# Altium PCB PCB1.PcbDoc
Units mil, origin at the board's own origin, x right, y up, seen from the top; angles counter-clockwise.
Board outline 3485 x 1215 mil, 2 copper layers (Top Layer, Bottom Layer); 8 components, 4 nets, 17 pads, 0 vias.
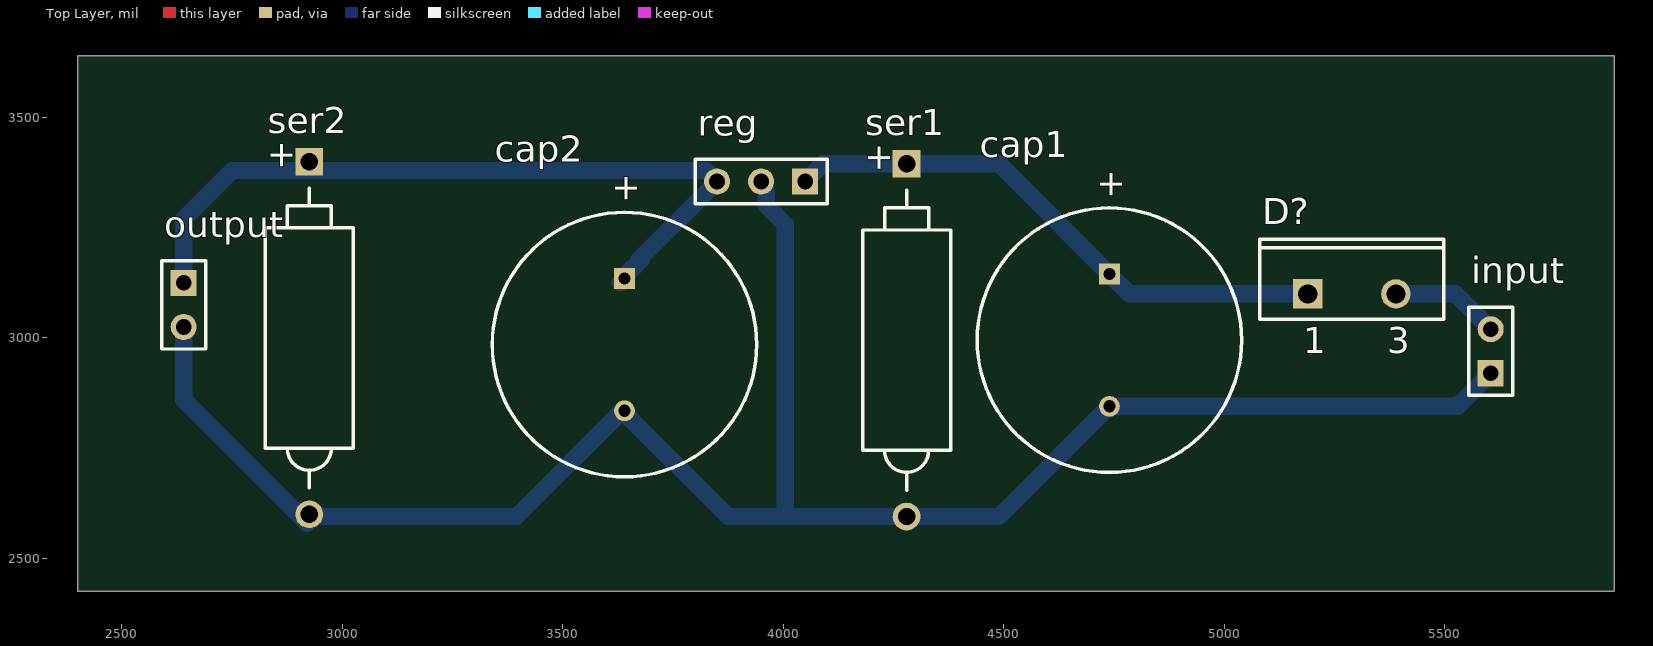
[diagram p0: Top Layer view]
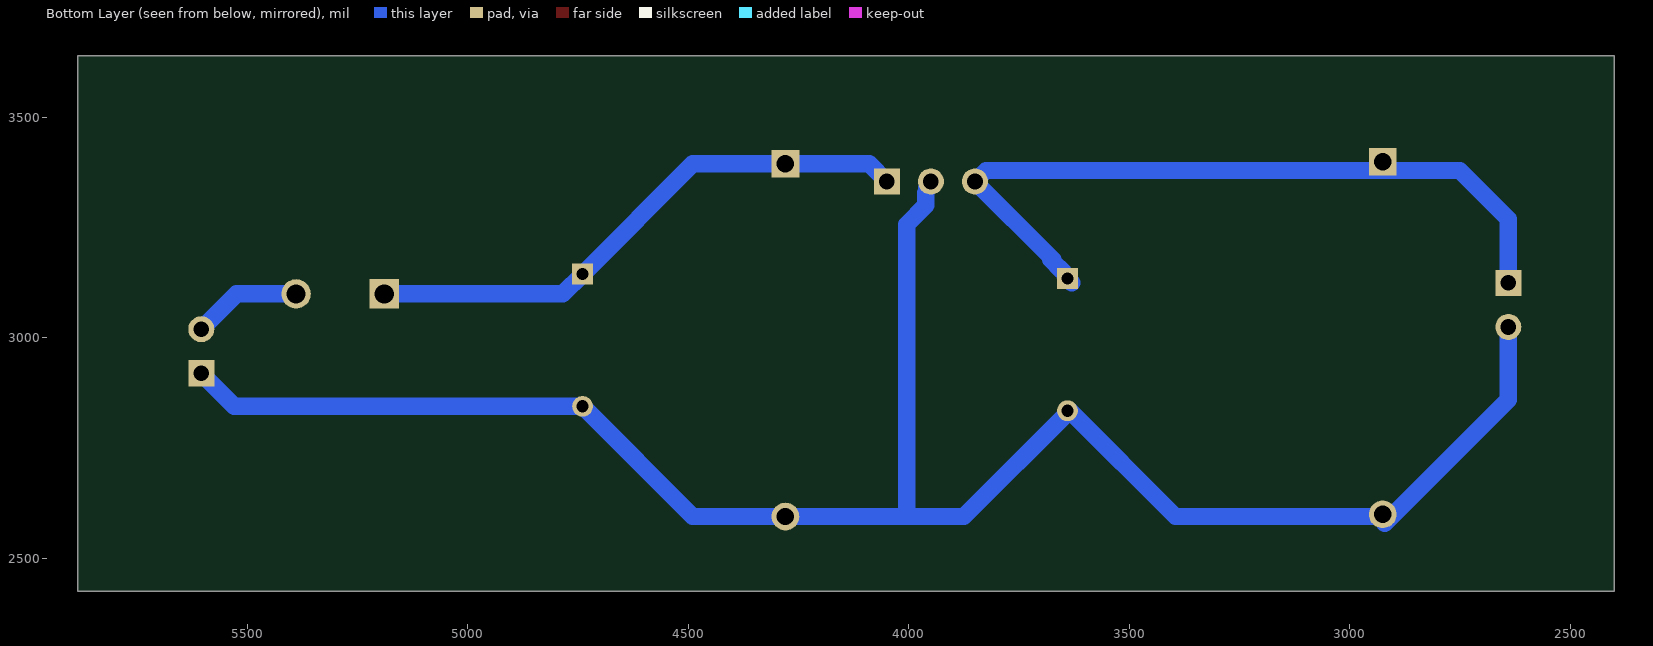
[diagram p1: Bottom Layer view, seen from below]

## Layer stack, top to bottom
Top Solder: solder mask 0.4, Solder Resist, Dk 3.5
Top Layer: signal copper 1.4
Dielectric 1: dielectric 12.6, FR-4, Dk 4.8
Bottom Layer: signal copper 1.4
Bottom Solder: solder mask 0.4, Solder Resist, Dk 3.5

## Board outline
2400,2425 5885,2425 5885,3640 2400,3640

## Design rules (kind name [scope] priority, off if disabled: settings)
Clearance [All] p1: gap=39.37 ignorepadtopadclearanceinfootprint=FALSE
PolygonConnect [All] p1: connectstyle=Direct reliefconductorwidth=10 reliefentries=4 polygonreliefangle="90 Angle" airgapwidth=10
RoutingLayers [All] p1: top layer_v5=FALSE bottom layer_v5=TRUE
RoutingVias [All] p1: holewidth=28 width=50 viastyle="Through Hole" minholewidth=28 minwidth=50 maxholewidth=28 maxwidth=50
SolderMaskExpansion [All] p1: expansion=4 istentingtop=FALSE
Width [All] p1: maxlimit=39.37 minlimit=39.37 preferedwidth=39.37 checkconnectedcopper=TRUE
29 further rules are at their usual default settings.

## Components (designator, comment, footprint, x,y, rotation, side; value= is the part's Value field where it differs from the comment)
cap1 "Cap 1" RB7.6-15 4740,2995 r90 top value=0.22microf
cap2 "Cap 2" RB7.6-15 3640,2985 r90 top value="10 microf"
D? "Diode 10TQ035" TO-220AC 5290,3100 r0 top
input "Header 2" HDR1X2 5605,2920 r90 top
output "Header 2" HDR1X2 2640,3125 r270 top
reg "Header 3" HDR1X3 4050,3355 r180 top
ser1 "Cap Pol2" POLAR0.8 4280,2995 r90 top value=0.1
ser2 "Cap Pol2" POLAR0.8 2925,3000 r90 top value=0.1

## Footprints (in the part's own frame and the unit in brackets; to place one, negate y for a bottom-side part, rotate by r counter-clockwise, add the part's x,y. Pads: shape width x height; smd on the part's side, far side on the other; paste and mask are expansions set on the pad)
HDR1X2 [mm] "Connector; Header; 2 Position"
  rect 1.5x1.5 hole 0.9: 1(0,0)
  round 1.5 hole 0.9: 2(2.54,0)
  silkscreen extent -1.27,-1.27 3.81,1.27
HDR1X3 [mm] "Connector; Header; 3 Position"
  rect 1.5x1.5 hole 0.9: 1(0,0)
  round 1.5 hole 0.9: 2(2.54,0) 3(5.08,0)
  silkscreen extent -1.27,-1.27 6.35,1.27
POLAR0.8 [mm] "Polarized Capacitor; 2 Leads"
  rect 1.6x1.6 hole 1: 1(10.16,0)
  round 1.6 hole 1: 2(-10.16,0)
  silkscreen extent -8.64,-2.54 8.64,2.54
RB7.6-15 [mm] "Polarized Capacitor (Radial); 2 Leads"
  rect 1.2x1.2 hole 0.7: 1(3.81,0)
  round 1.2 hole 0.7: 2(-3.81,0)
  silkscreen extent -7.62,-7.62 7.62,7.62
TO-220AC [mm] "TO, Thru-Hole, Vertical, Heatsink Mounted; 3 In-Line Leads (1 Absent); Pitch 2.54 mm"
  rect 1.7x1.7 hole 1.1: 1(-2.54,0)
  round 1.7 hole 1.1: 3(2.54,0)
  silkscreen extent -5.3,-1.45 5.3,3.15

## Part data
cap1 cap2: library part "Cap Pol1", "Polarized Capacitor (Radial)", LatestRevisionDate=17-Jul-2002, LatestRevisionNote="Re-released for DXP Platform.", PackageDescription="Polarized Capacitor (Radial); 2 Leads", PackageReference=RB7.6-15, Published=8-Jun-2000, Publisher="Altium Limited"
D?: "Schottky Rectifier", ComponentLink1Description="Manufacturer Link", ComponentLink1URL=http://www.irf.com/, ComponentLink2Description=Datasheet, ComponentLink2URL=http://www.irf.com/product-info/datasheets/data/10tq.pdf, DatasheetVersion=PD-2.057B, LatestRevisionDate=17-Jul-2002, LatestRevisionNote="Re-released for DXP Platform.", Note="Terminal 2 is the TAB and is electrically connected to the cathode", PackageDescription="TO, Thru-Hole, Vertical, Heatsink Mounted; 3 In-Line Leads (1 Absent); Pitch 2.54 mm", PackageReference=TO-220AC, PackageVersion=Feb-1998, Published=8-Jun-2000, Publisher="Altium Limited"
input output: "Header, 2-Pin", LatestRevisionDate=17-Jul-2002, LatestRevisionNote="Re-released for DXP Platform.", Publisher="Altium Limited"
reg: "Header, 3-Pin", LatestRevisionDate=17-Jul-2002, LatestRevisionNote="Re-released for DXP Platform.", Publisher="Altium Limited"
ser1 ser2: "Polarized Capacitor (Axial)", LatestRevisionDate=17-Jul-2002, LatestRevisionNote="Re-released for DXP Platform.", PackageDescription="Polarized Capacitor; 2 Leads", PackageReference=POLAR0.8, Published=8-Jun-2000, Publisher="Altium Limited"

## Nets (pads, with @x,y where several pads share a name; then routed paths per layer and width w, separated by ;. In a path a pad name is that pad's centre, name@x,y a point inside that pad or via, vN(x,y) a via of type N, cw(c..) or ccw(c..) an arc to the next point about the centre after c; other vN are vias at no path point)
5v: cap2.1 output.1 reg.3 ser2.1 | length 1752.5
  Bottom Layer w39.37: output.1 2640,3270 2750,3380 2920,3380 3825,3380 reg.3 3673,3178 3673,3173 cap2.1@3650,3150 ; cap2.1@3630,3125 cap2.1@3645,3140 ; cap2.1@3655,3155 3678,3178
12v: cap1.1 D?.1 reg.1 ser1.1 | length 1278.8
  Bottom Layer w39.37: reg.1 4090,3395 ser1.1 4490,3395 cap1.1 4785,3100 D?.1
GND: cap1.2 cap2.2 input.1 output.2 reg.2 ser1.2 ser2.2 | length 4371.4
  Bottom Layer w39.37: output.2 2640,2860 2920,2580 2928.33,2595 2928.81,2595.48 2946.22,2595.48 2946.7,2595 3395,2595 3635,2835 3875,2595 4005,2595 ; reg.2 3950,3349.67 3959.84,3339.83 3959.84,3331.24 3961.42,3329.66 3961.42,3301.01 4005,3257.43 4005,2595 ; input.1 5530,2845 cap1.2 4490,2595 ser1.2 4005,2595
NetD?_3: D?.3 input.2 | length 248.1
  Bottom Layer w39.37: D?.3 5525,3100 input.2

## Dimensions
2400,3650 to 2400,2425 on Top Layer
2400,3640 to 5885,3640 on Top Layer

## Text inside footprints (layer, text, board x,y; h text height)
cap1: Top Overlay "+" at 4769.01,3315.15 h59.06 r90
cap2: Top Overlay "+" at 3669.01,3305.15 h59.06 r90
D?: Top Overlay "1" at 5180.16,2965.16 h59.06; Top Overlay "3" at 5370.31,2965.16 h59.06
ser1: Top Overlay "+" at 4242.6,3375 h59.06 r90
ser2: Top Overlay "+" at 2887.6,3380 h59.06 r90